# EAGLE board UV - SERVO_CTRL - Copy (EAGLE 6.3)
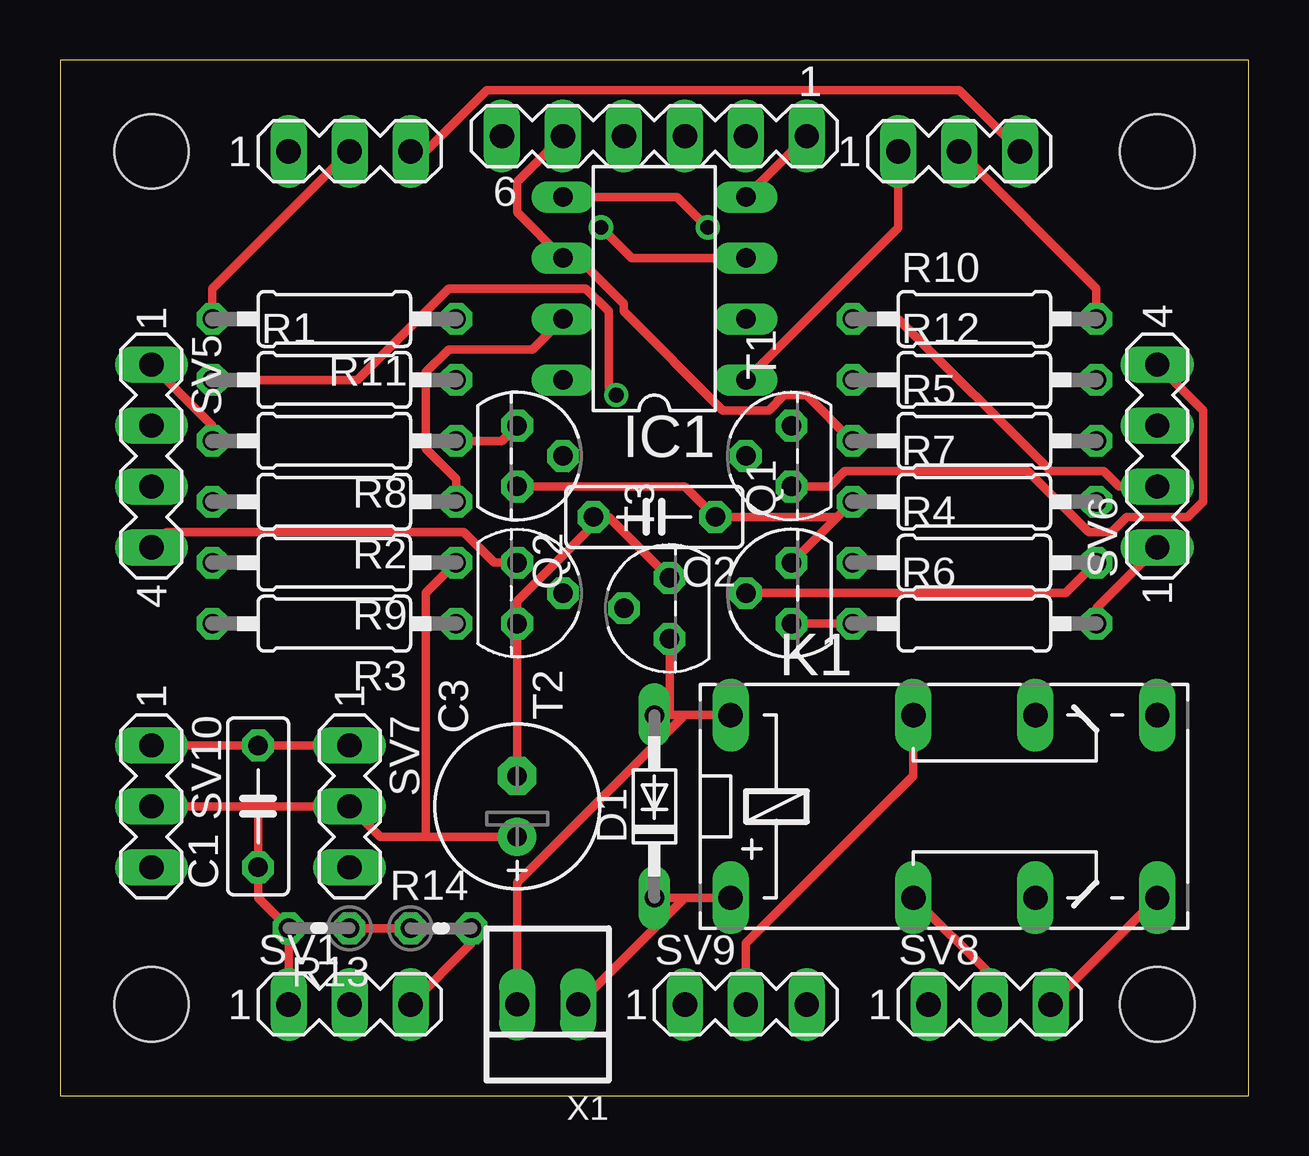
[diagram p0: board, top side]
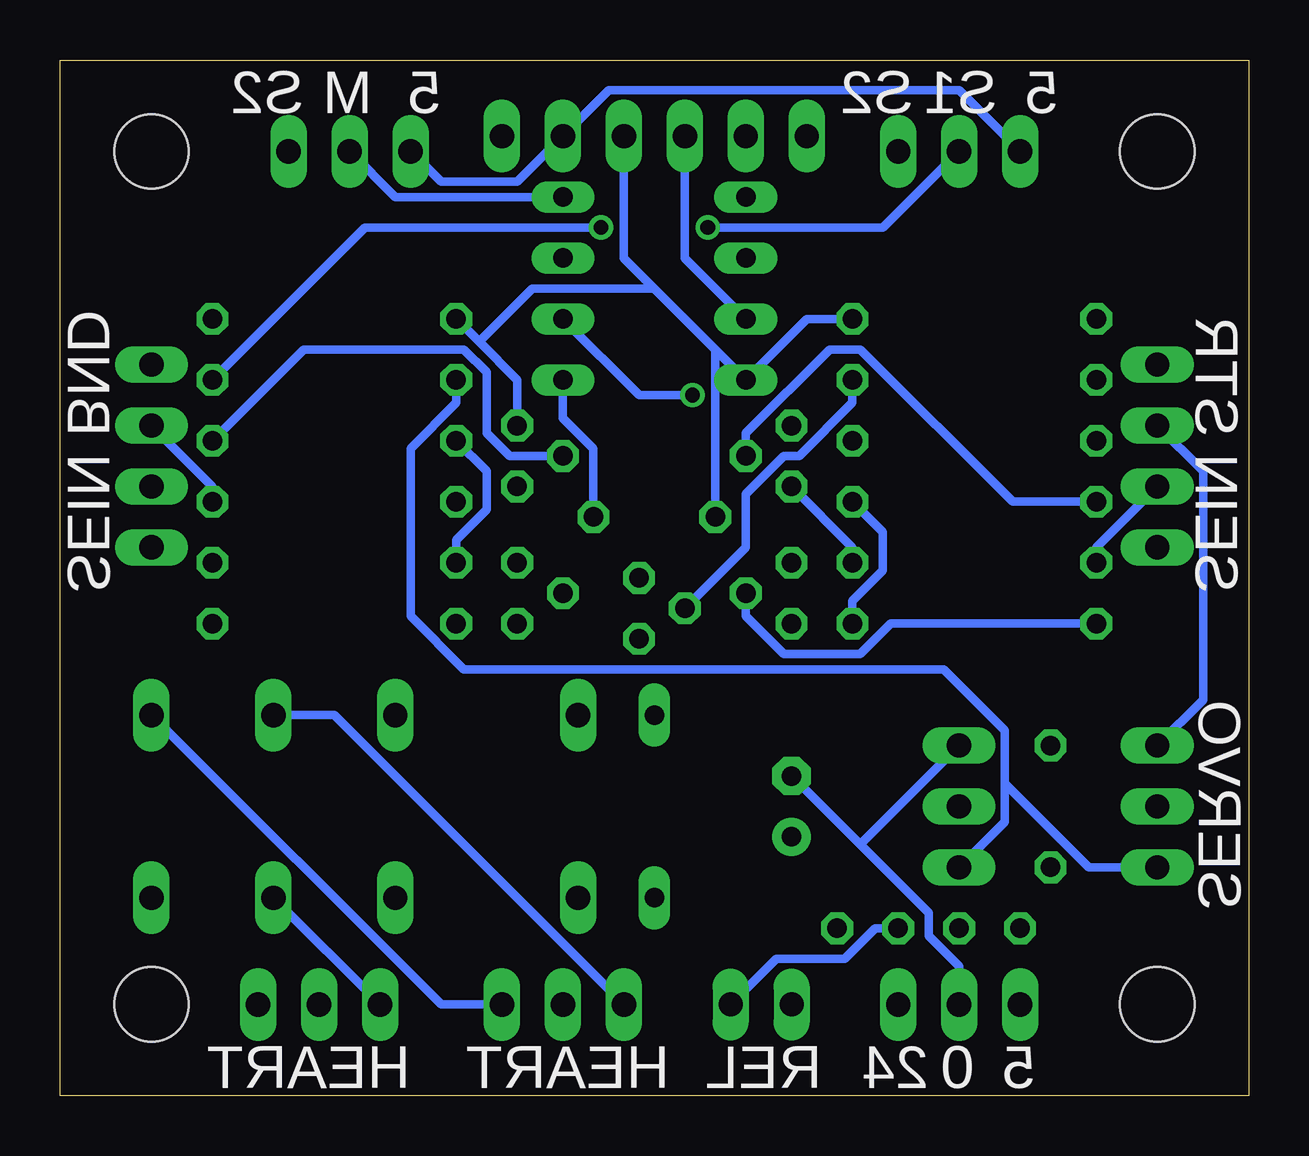
[diagram p1: board, bottom side, seen from below]

Size 49.53 x 43.18 mm. Coordinates in mm from the lower left corner, seen from the top.
Outline: 0,0 49.53,0 49.53,43.18 0,43.18 0,0
Copper layers (1*16): Top 0.035mm / dielectric 1.5mm / Bottom 0.035mm
Design rules "default": minimum track width 10mil, minimum drill 24mil, track to track 8mil, track to pad 8mil, pad to pad 8mil, via to via 8mil, smd to smd 8mil, copper to edge 40mil, drill to drill 8mil, minimum pad ring 10mil, minimum via ring 8mil, stop-mask expansion 4mil, vias tented up to drill 0mil, thermal gap 10mil
Net classes: 0 default: width 0.356 mm, drill 0.305 mm, clearance 0.203 mm
Holes 3.1 mm at 3.81,3.81 45.72,3.81 3.81,39.37 45.72,39.37

## Footprints (pad centres in the part's own frame; a part is rotated, then mirrored left to right if it is on the bottom)
C050-025X075 = drill 0.813 octagon: 1 -2.54,0; 2 2.54,0
E2,5-7 = drill 0.813 pad 1.6: + -1.27,0 | drill 0.813 pad 1.6 octagon: - 1.27,0
DO34-7 = drill 0.813 long: A 3.81,0; C -3.81,0
DIL8 = drill 0.813 long: 1 -3.81,-3.81; 2 -1.27,-3.81; 3 1.27,-3.81; 4 3.81,-3.81; 5 3.81,3.81; 6 1.27,3.81; 7 -1.27,3.81; 8 -3.81,3.81
G6A-234P = drill 1.016 long: 1 -3.81,-3.81; 16 -3.81,3.81; O1 8.89,-3.81; O2 8.89,3.81; P1 3.81,-3.81; P2 3.81,3.81; S1 13.97,-3.81; S2 13.97,3.81
TO92 = drill 0.813 octagon: 1 1.27,0; 2 0,1.905; 3 -1.27,0
0207/10 = drill 0.813 octagon: 1 -5.08,0; 2 5.08,0
0204V = drill 0.813 octagon: 1 -1.27,0; 2 1.27,0
MA03-1 = drill 1.016 long: 1 -2.54,0; 2 0,0; 3 2.54,0
MA06-1 = drill 1.016 long: 1 -6.35,0; 2 -3.81,0; 3 -1.27,0; 4 1.27,0; 5 3.81,0; 6 6.35,0
MA04-1 = drill 1.016 long: 1 -3.81,0; 2 -1.27,0; 3 1.27,0; 4 3.81,0
22-23-2021 = drill 1 long: 1 -1.27,0; 2 1.27,0

## Placement (x,y rotation side)
C1  220Nf  [C050-025X075]  8.26,12.06 90 top
C2  220nF  [C050-025X075]  24.77,24.13 180 top
C3  100uF  [E2,5-7]  19.05,12.06 90 top
D1  BAT85  [DO34-7]  24.77,12.06 90 top
IC1  PIC12F675P  [DIL8]  24.77,33.66 90 top
K1  G6A-234P  [G6A-234P]  31.75,12.06 0 top
Q1  BC557  [TO92]  30.48,20.95 90 top
Q2  BC557  [TO92]  19.05,26.67 270 top
R1  4K7  [0207/10]  11.43,29.84 0 top
R2  4K7  [0207/10]  11.43,24.77 180 top
R3  4K7  [0207/10]  11.43,19.68 180 top
R4  4K7  [0207/10]  38.1,22.23 0 top
R5  4K7  [0207/10]  38.1,27.3 0 top
R6  150E  [0207/10]  38.1,19.68 0 top
R7  150E  [0207/10]  38.1,24.77 0 top
R8  150E  [0207/10]  11.43,27.3 180 top
R9  150E  [0207/10]  11.43,22.23 180 top
R10  1K  [0207/10]  38.1,32.38 0 top
R11  1K  [0207/10]  11.43,32.38 180 top
R12  220E  [0207/10]  38.1,29.84 0 top
R13  0E  [0204V]  10.79,6.99 180 top
R14  0E  [0204V]  15.88,6.99 0 top
SV1  Supply  [MA03-1]  12.06,3.81 0 top
SV2  Switch_Input  [MA03-1]  12.06,39.37 0 top
SV3  Select_Jumper  [MA03-1]  37.47,39.37 0 top
SV4  ICSP  [MA06-1]  24.77,40.01 180 top
SV5  Sein_Straight  [MA04-1]  3.81,26.67 270 top
SV6  Sein_Bend  [MA04-1]  45.72,26.67 90 top
SV7  Servo_Out  [MA03-1]  12.06,12.06 270 top
SV8  Heart_Pol1  [MA03-1]  38.73,3.81 0 top
SV9  Heart_Pol2  [MA03-1]  28.57,3.81 0 top
SV10  Servo_Out2  [MA03-1]  3.81,12.06 270 top
T1  BC547  [TO92]  30.48,26.67 90 top
T2  BC547  [TO92]  19.05,20.95 270 top
T3  BC547  [TO92]  25.4,20.32 90 top
X1  22-23-2021  [22-23-2021]  20.32,3.81 180 top

## Library data of the parts
C1-C3 R1-R14 = rcl
D1 = diode
IC1 = microchip; MF: MICROCHIP; MPN: PIC12F675-E/P; OC_FARNELL: 9759018; OC_NEWARK: 92C4340
K1 = relay; OC_FARNELL: unknown; OC_NEWARK: unknown
Q1 Q2 = transistor-pnp
SV1-SV10 = con-lstb; OC_FARNELL: unknown; OC_NEWARK: unknown
T1-T3 = transistor
X1 = con-molex; MF: MOLEX; MPN: 22-23-2021; OC_FARNELL: 1462926; OC_NEWARK: 25C3832

## Nets
0V: C1.2 C2.2 C3.- IC1.8 R10.1 R11.1 SV1.2 SV4.3 SV5.2 SV6.2 SV7.1 SV10.1 T1.1 T2.1 T3.1
+5V: C1.1 C2.1 C3.+ IC1.1 Q1.1 Q2.1 R7.1 R9.1 R13.2 SV1.1 SV2.1 SV3.1 SV4.2 SV7.2 SV10.2
+24V: R14.2 SV1.3
HEART_POL: IC1.2 R1.1
ICSPCLK: IC1.6 R4.1 R5.1 SV4.5
ICSPDAT: IC1.7 R2.1 R3.1 SV4.4
N$1: IC1.3 R11.2 SV2.2
N$2: K1.O1 SV8.1
N$3: SV2.3 SV3.3
N$4: K1.S1 SV8.3
N$5: K1.P1 SV8.2
N$6: K1.O2 SV9.1
N$7: K1.S2 SV9.3
N$8: K1.P2 SV9.2
N$9: IC1.5 R12.2
N$10: R1.2 T3.2
N$11: D1.C K1.1 R13.1 R14.1 X1.1
N$12: D1.A K1.16 T3.3 X1.2
N$13: Q1.2 R4.2
N$14: R6.2 SV6.1
N$15: Q1.3 R6.1
N$16: R5.2 T1.2
N$18: SV6.4 T1.3
N$19: R7.2 SV6.3
N$20: Q2.2 R2.2
N$21: Q2.3 R8.1
N$22: R8.2 SV5.1
N$23: R9.2 SV5.3
N$24: SV5.4 T2.3
N$25: R3.2 T2.2
SERVO_OUT: R12.1 SV7.3 SV10.3
VPP: IC1.4 R10.2 SV3.2 SV4.1

## Tracks (layer width: path | path; a pad name or v marks a point on that pad's centre or on a via)
0V
  Top 0.356: SV7.1 C1.2 SV10.1 | C3.- T2.1 19.05,20.64 22.54,24.13 | SV6.2 44.13,25.4 43.5,26.04 41.27,26.04 34.92,32.38 R10.1 | 22.54,24.13 22.86,24.13 T3.1 | 22.54,24.13 C2.2
  Bottom 0.356: SV5.2 1.91,26.04 1.91,16.51 SV10.1 | SV1.2 12.06,5.4 13.34,6.67 13.34,7.62 16.19,10.48 | C3.- 16.19,10.48 | 16.19,10.48 SV7.1 | T1.1 30.48,29.84 32.07,31.43 | R10.1 32.07,31.43 | R11.1 18.41,32.38 IC1.8 22.23,31.11 | SV4.3 26.04,34.92 24.77,33.66 | 22.23,31.11 24.77,33.66 | 22.23,31.11 C2.2 | 32.07,31.43 29.84,33.66 24.77,33.66
+5V
  Top 0.356: SV1.1 R13.2 8.26,8.26 C1.1 8.26,12.06 | 8.26,12.06 SV7.2 13.34,10.79 15.24,10.79 | 8.26,12.06 SV10.2 | 15.24,10.79 C3.+ | R7.1 32.38,24.13 | 32.38,24.13 Q1.1 | 32.38,24.13 C2.1 26.04,25.4 Q2.1 | SV3.1 34.92,36.2 IC1.1 | 15.24,10.79 15.24,20.95 R9.1
  Bottom 0.356: SV2.1 12.06,41.91 26.67,41.91 SV4.2 30.48,38.1 33.66,38.1 SV3.1 | R9.1 16.51,22.86 Q2.1 | IC1.1 28.57,28.26 27.3,26.99 C2.1
+24V
  Top 0.356: R14.2 17.14,6.35 SV1.3
HEART_POL  (via drill 0.61)
  Top 0.356: R1.1 12.38,29.84 16.19,33.66 21.91,33.66 22.86,32.7 22.86,29.53 v23.18,29.21
  Bottom 0.356: v23.18,29.21 25.4,29.21 IC1.2
ICSPCLK
  Top 0.356: SV4.5 19.05,38.1 19.05,36.83 IC1.6 21.59,34.92 23.5,33.02 23.5,32.7 27.62,28.57 29.53,28.57 30.16,29.21 31.11,29.21 R5.1
  Bottom 0.356: R4.1 33.02,23.18 31.75,24.45 31.75,26.04 R5.1
ICSPDAT
  Top 0.356: R2.1 16.51,25.72 15.24,26.99 15.24,30.16 16.19,31.11 19.68,31.11 IC1.7
  Bottom 0.356: R3.1 16.51,20.64 15.24,21.91 15.24,23.5 R2.1 | IC1.7 23.5,34.92 SV4.4
N$1  (via drill 0.61)
  Top 0.356: R11.2 6.35,33.66 SV2.2 | IC1.3 23.81,34.92 v22.54,36.2
  Bottom 0.356: v22.54,36.2 15.24,36.2 SV2.2
N$2
  Bottom 0.356: K1.O1 SV8.1
N$3
  Top 0.356: SV2.3 15.24,39.37 17.78,41.91 37.47,41.91 SV3.3
N$4
  Top 0.356: K1.S1 SV8.3
N$5
  Top 0.356: SV8.2 38.73,5.08 K1.P1
N$6
  Bottom 0.356: SV9.1 38.1,15.88 K1.O2
N$7
  Bottom 0.356: SV9.3 33.66,3.81 K1.S2
N$8
  Top 0.356: SV9.2 28.57,6.35 35.56,13.34 K1.P2
N$9  (via drill 0.61)
  Top 0.356: IC1.5 25.72,37.47 v26.99,36.2
  Bottom 0.356: v26.99,36.2 36.83,36.2 R12.2
N$10
  Bottom 0.356: R1.2 16.51,28.89 18.73,26.67 19.37,26.67 20.95,25.08 20.95,22.86 T3.2
N$11
  Top 0.356: R14.1 R13.1 | K1.1 26.04,8.26 | 26.04,8.26 D1.C | 26.04,8.26 X1.1
  Bottom 0.356: R14.1 15.56,6.99 16.83,5.71 19.68,5.71 X1.1
N$12
  Top 0.356: K1.16 26.04,15.88 | 26.04,15.88 25.4,15.88 | 25.4,15.88 T3.3 | 25.4,15.88 D1.A | X1.2 19.05,8.89 26.04,15.88
N$13
  Top 0.356: Q1.2 41.91,20.95 R4.2
N$14
  Top 0.356: R6.2 43.18,20.32 SV6.1
N$15
  Top 0.356: R6.1 Q1.3
N$16
  Bottom 0.356: T1.2 30.8,26.67 31.75,27.62 31.75,30.16 32.7,31.11 39.37,31.11 R5.2
N$18
  Top 0.356: T1.3 32.07,25.4 32.7,26.04 40.32,26.04 42.86,23.5 43.81,23.5 44.45,24.13 46.99,24.13 47.62,24.77 47.62,28.57 SV6.4
N$19
  Bottom 0.356: R7.2 43.18,25.4 SV6.3
N$20
  Bottom 0.356: R2.2 9.84,24.77 16.19,31.11 17.46,31.11 20.95,27.62 Q2.2
N$21
  Top 0.356: R8.1 18.41,27.3 Q2.3
N$22
  Top 0.356: R8.2 6.35,27.94 SV5.1
N$23
  Bottom 0.356: R9.2 6.35,22.86 SV5.3
N$24
  Top 0.356: T2.3 18.1,22.23 16.83,23.5 4.45,23.5 SV5.4
N$25
  Bottom 0.356: R3.2 14.92,19.68 16.19,18.41 19.37,18.41 20.95,20 T2.2
SERVO_OUT
  Bottom 0.356: R12.1 33.02,28.89 34.92,26.99 34.92,20 32.7,17.78 12.7,17.78 10.16,15.24 10.16,13.02 | 10.16,13.02 10.16,11.43 SV7.3 | SV10.3 6.67,9.53 10.16,13.02
VPP
  Top 0.356: SV4.1 IC1.4 | R10.2 43.18,33.66 SV3.2
  Bottom 0.356: IC1.4 35.56,37.47 SV3.2

## Text on the board
bNames: 5 | S1 | S2 | 5 | M | S2 | SEIN STR | SEIN BND | SERVO | 5 | 0 | 24 | REL | HEART | HEART